# Altium PCB SM3320-BATT-EV.PcbDoc (part 2 of 2)
Units mm, origin at the board's own origin, x right, y up, seen from the top; angles counter-clockwise.
Board outline 215 x 68 mm, 2 copper layers (Top Layer, Bottom Layer), stack 1.662 mm thick; 183 components, 86 nets, 440 pads, 263 vias.
Unrouted connection lines stored in the file: 6.
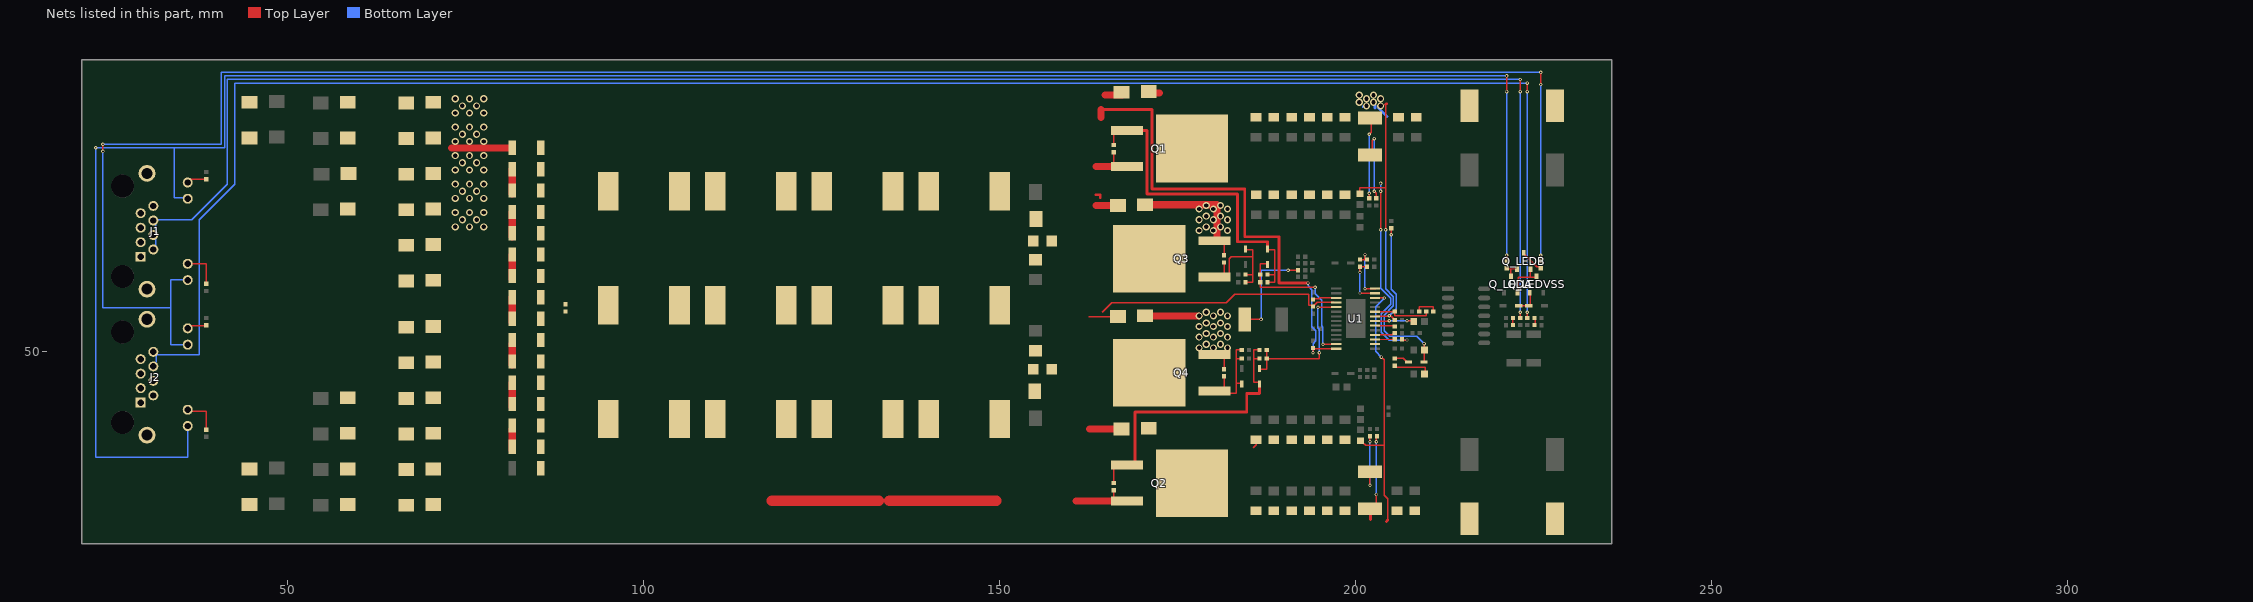
[diagram p2: the nets of this part, all layers, seen from the top]

## Via types
v1: diameter 1, hole 0.6, Top Layer to Bottom Layer, tented both sides, 168 vias
v2: diameter 0.48, hole 0.254, Top Layer to Bottom Layer, tented both sides, 95 vias

## Nets (pads, with @x,y where several pads share a name; then routed paths per layer and width w, separated by ;. In a path a pad name is that pad's centre, name@x,y a point inside that pad or via, vN(x,y) a via of type N, cw(c..) or ccw(c..) an arc to the next point about the centre after c; other vN are vias at no path point) (continued)
ISNS_F+: CISNS.2 Risns+.1 U1.14 | length 7.7
  Top Layer w0.2: CISNS.2@200.6,62.908 201.292,62.908 201.3,62.9 v2(201.3,63.6) ; v2(201.3,58.8) 201.32,58.82 U1.14@202.7,58.82 U1.14@202.8,58.82 ; Risns+.1@201.592,62.908 Risns+.1@201.6,62.9
  Bottom Layer w0.2: v2(201.3,58.8) v2(201.3,63.6)
ISNS_F-: CISNS.1 Risns-.1 U1.13 | length 6.6
  Top Layer w0.2: v2(200.6,58.2) U1.13@202.7,58.17 ; v2@200.6,61.3 CISNS.1@200.6,61.892 ; CISNS.1@200.6,61.9 CISNS.1@200.6,61.892 ; Risns-.1@201.6,61.9 201.592,61.892 CISNS.1@200.6,61.892
  Bottom Layer w0.2: v2(200.6,58.2) v2(200.6,61.1)
LED_A: J1.11 J2.9 R_LEDB_O.2 | length 304.2
  Top Layer w0.2: R_LEDB_O.2@221.2,62.708 v2(221.2,63.5) ; v2(221.2,86.5) v2(221.2,88.7)
  Bottom Layer w0.2: J2.9@35.915,39.517 35.915,35.1 23,35.1 23,75.7 v2(23,78.6) 34,78.6 ; J1.11@36,71.6 34,71.6 34,78.6 ; v2(221.2,63.5) v2(221.2,86.5) ; v2@221.3,88.7 v2(221.2,88.7) 41.1,88.7 41.1,78.6 34,78.6
LED_B: J1.9 J2.11 R_LEDA_O.2 | length 285.3
  Top Layer w0.2: v2(24,78.1) v2(24,79.1) v2@24,79.2 ; R_LEDA_O.2@226,62.708 v2(226,63.5) ; v2(226,87.5) v2(226,89.2)
  Bottom Layer w0.2: v2(24,78.1) 24,56.1 33.5,56.1 ; v2(24,79.1) 40.6,79.1 40.6,89.2 v2(226,89.2) ; J2.11@35.915,50.947 33.5,50.947 33.5,56.1 ; J1.9@36,60.1 33.5,60.1 33.5,56.1 ; v2(226,63.5) v2(226,87.5)
LED_VSS: Q_LEDA.2 Q_LEDB.2 Q_LEDVSS.3 | length 5.8
  Top Layer w0.2: Q_LEDA.2@222.8,58.6 222.8,60.4 224.5,60.4 ; Q_LEDB.2@224.4,61.5 224.5,61.5 224.5,60.4 ; Q_LEDVSS.3@225.5,60.55 225.35,60.4 224.5,60.4
MODE: Rmode.2 U1.4 | length 2.5
  Top Layer w0.2: U1.4@203,52.32 205.08,52.32 ; 205.12,52.32 Rmode.2@205.4,52.6
NetC18_1: C18.1 D15.2 R110.2
NetC19_1: C19.1 D14.2 R140.2
NetCcomp_2: Ccomp.2 Rcomp.1 | length 3.5
  Top Layer w0.2: Ccomp.2@208.9,55.5 208.9,56.3 210.908,56.3 Rcomp.1@210.908,55.6
NetD3_2: D3.2 Q1.1 R4.2 R18.2 R18_a.2 | length 50.9
  Top Layer w0.2: R4.2@166,79.008 166,81 Q1.1@166.1,81 ; D3.2@187.6,64.4 187.6,64.3 188.6,64.3 ; R18.2@187.608,59.7 188.6,59.7 ; R18_a.2@187.608,60.8 188.6,60.8 ; 188.6,59.7 188.6,60.8 ; 188.6,59.7 188.6,60.8 ; 188.6,60.8 188.6,64.3 ; 188.6,60.8 188.6,64.3
  Top Layer w0.4: Q1.1@167.856,81.04 170.7,81.04 170.7,72.1 183.4,72.1 183.4,65.4 187.6,65.4 D3.2@187.6,64.3
NetD4_2: D4.2 Q2.1 R3.1 R19.1 R19_a.1 | length 38.3
  Top Layer w0.2: R3.1@166,31.508 Q2.1@166,33.5 ; R19_a.1@186.492,49 185.7,49 ; R19.1@186.492,50.2 185.7,50.2 185.7,49 ; D4.2@186.5,45.7 185.7,45.7 185.7,49
  Top Layer w0.4: Q2.1@168.5,33.7 Q2.1@168.6,33.7 ; Q2.1@169,33.7 169,41.5 184.7,41.5 184.7,44.1 186.5,44.1 186.5,45 D4.2@186.5,45.5
NetD5_2: D5.2 Q3.1 R22.2 R32.2 R32_a.2 | length 17.1
  Top Layer w0.2: Q3.1@181.5,61 R22.2@181.5,62.492 ; Q3.1@182,60.4 182,60.46 Q3.1@182,60.5 ; Q3.1@182.2,60.46 182.2,63 182.5,63.3 185.5,63.3 ; D5.2@184.5,64.3 185.5,64.3 185.5,63.3 ; R32_a.2@184.508,60.8 185.5,60.8 ; R32.2@184.608,59.7 185.5,59.7 185.5,60.8 ; 185.5,60.8 185.5,63.3
  Top Layer w0.4: Q3.1@182,60.2 Q3.1@182,60.4
  Top Layer w0.5: Q3.1@180.144,60.46 Q3.1@182,60.46
NetD6_2: D6.2 Q4.1 R23.1 R33.1 R33_a.1 | length 15.4
  Top Layer w0.2: Q4.1@181.5,45 R23.1@181.5,46.492 ; 182.4,44.1 183.2,44.1 183.2,45.5 ; R33.1@183.9,50.2 183.2,50.2 ; R33_a.1@183.984,49 183.2,49 ; D6.2@184,45.5 183.5,45.5 183.2,45.5 ; 183.2,45.5 183.2,49 ; 183.2,45.5 183.2,49 ; 183.2,49 183.2,50.2 ; 183.2,49 183.2,50.2
NetD_CLAMP_1_2: D_CLAMP_1.2 D_CLAMP_2.1 | length 0.5
  Top Layer w0.5: D_CLAMP_2.1@85.5,75.1 D_CLAMP_2.1@85.5,75.6
NetD_CLAMP_2_2: D_CLAMP_2.2 D_CLAMP_3.1 | length 3.5
  Top Layer w1: D_CLAMP_3.1@81.5,72.1 D_CLAMP_2.2@81.5,75.6
NetD_CLAMP_3_2: D_CLAMP_3.2 D_CLAMP_4.1 | length 0
NetD_CLAMP_4_2: D_CLAMP_4.2 D_CLAMP_5.1 | length 3.5
  Top Layer w1: D_CLAMP_5.1@81.5,66.1 D_CLAMP_4.2@81.5,69.6
NetD_CLAMP_5_2: D_CLAMP_5.2 D_CLAMP_6.1
NetD_CLAMP_6_2: D_CLAMP_6.2 D_CLAMP_7.1 | length 3.5
  Top Layer w1: D_CLAMP_7.1@81.5,60.1 D_CLAMP_6.2@81.5,63.6
NetD_CLAMP_7_2: D_CLAMP_7.2 D_CLAMP_8.1 R160.2
NetD_CLAMP_8_2: D_CLAMP_8.2 D_CLAMP_9.1 | length 4
  Top Layer w0.5: D_CLAMP_8.2@81.5,57.6 D_CLAMP_8.2@81.5,58.1
  Top Layer w1: D_CLAMP_9.1@81.5,54.1 D_CLAMP_8.2@81.5,57.6
NetD_CLAMP_9_2: D_CLAMP_9.2 D_CLAMP_10.1 R160.1
NetD_CLAMP_10_2: D_CLAMP_10.2 D_CLAMP_11.1 | length 3
  Top Layer w1: D_CLAMP_11.1@81.5,48.1 D_CLAMP_10.2@81.5,51.1
NetD_CLAMP_11_2: D_CLAMP_11.2 D_CLAMP_12.1
NetD_CLAMP_12_2: D_CLAMP_12.2 D_CLAMP_13.1 | length 3.5
  Top Layer w1: D_CLAMP_13.1@81.5,42.1 D_CLAMP_12.2@81.5,45.6
NetD_CLAMP_13_2: D_CLAMP_13.2 D_CLAMP_14.1
NetD_CLAMP_14_2: D_CLAMP_14.2 D_CLAMP_15.1 | length 3
  Top Layer w1: D_CLAMP_15.1@81.5,36.1 D_CLAMP_14.2@81.5,39.1
NetD_CLAMP_15_2: D_CLAMP_15.2 D_CLAMP_16.1
NetDf_1: Df.1 Rf.2 | length 1.8
  Top Layer w0.2: Rf.2@205.5,49.008 206.692,49.008 Df.1@207.1,48.6
NetJ1_10: J1.10 R101.2 | length 5.2
  Top Layer w0.2: J1.10@35.9,62.3 38.5,62.3 R101.2@38.5,59.7 ; R101.2@38.5,59.5 R101.2@38.5,59.508
NetJ1_12: J1.12 R100.2 | length 2.5
  Top Layer w0.2: J1.12@36.2,74.2 R100.2@38.7,74.2
NetJ1_S1: J1.S1 J1.S2
NetJ2_10: J2.10 R102.2 | length 5.1
  Top Layer w0.2: J2.10@36,41.6 38.5,41.6 R102.2@38.5,39.008
NetJ2_12: J2.12 R103.2 | length 2.5
  Top Layer w0.2: J2.12@36,53.6 R103.2@38.5,53.6
NetJ2_S1: J2.S1 J2.S2
NetQ_LEDA_3: Q_LEDA.3 Q_LEDB.1 R_LEDB_O.1 | length 2.9
  Top Layer w0.2: R_LEDB_O.1@221.2,61.692 221.2,61.6 221.8,61.6 ; Q_LEDA.3@221.7,60.55 221.8,60.65 221.8,61.6 ; Q_LEDB.1@222.7,61.5 Q_LEDB.1@222.65,61.55 Q_LEDB.1@222.6,61.6 ; Q_LEDB.1@222.7,61.7 Q_LEDB.1@222.6,61.6 ; 221.8,61.6 Q_LEDB.1@222.6,61.6
NetQ_LEDB_3: Q_LEDB.3 R_LEDA_O.1 | length 3.2
  Top Layer w0.2: Q_LEDB.3@223.6,63.8 223.6,63.7 225.4,61.9 225.692,61.9 R_LEDA_O.1@225.9,61.692
NetR_1A_a_2: R_1A_a.2 R_1A_b.1 | length 1
  Top Layer w0.2: R_1A_b.1@222.092,53.7 222.092,54.692 R_1A_a.2@222.1,54.7
NetR_1B_a_2: R_1B_a.2 R_1B_b.1 | length 1.1
  Top Layer w0.2: R_1B_b.1@225.2,53.6 225.208,53.608 225.208,53.7 R_1B_a.2@225.208,54.7
PAN_DET: D_1A.1 D_1B.1 Q_LEDVSS.1 | length 3.8
  Top Layer w0.2: D_1A.1@222.5,56.4 222.6,56.4 D_1B.1@224.4,56.4 ; D_1B.1@224.5,56.4 224.5,58.25 Q_LEDVSS.1@224.55,58.25
PGND: D9.2 D12.2 Q3.3 Q4.3 R22.1 R23.2 R40.1 Rcsp.2 | length 39
  Top Layer w0.2: Q4.3@181.4,49.4 Q4.3@181.4,49.508 ; R23.2@181.5,47.508 Q4.3@181.5,49.5 ; R22.1@181.5,63.508 Q3.3@181.5,65 ; R40.1@184.5,54.5 v2(186.7,54.5) ; R40.1@184.5,55.5 R40.1@184.5,55.6 ; v2(190.5,61.4) 191.7,61.4 Rcsp.2@191.8,61.3
  Top Layer w1: D9.2@170.4,55 v1(178,55) ; 171.5,70.6 180.5,70.6 ; Q3.3@180.5,65.5 180.5,68.5 v1@180.5,70
  Bottom Layer w0.2: v2(186.7,54.5) 186.7,61.4 v2(190.5,61.4)
  other v1: 178,50.5 180,50.5 182,50.5 179,51 181,51 178,52 180,52 182,52 179,52.5 181,52.5 178,53.5 180,53.5 182,53.5 179,54 181,54 180,55 182,55 179,55.5 181,55.5 178,67 180,67 182,67 179,67.5 181,67.5 178,68.5 180,68.5 182,68.5 179,69 181,69 178,70 180,70 182,70 179,70.5 181,70.5
PGOOD: Rpg.1 U1.17 | length 3.4
  Top Layer w0.2: Rpg.1@193.9,57.2 Rpg.1@194.1,57.4 ; Rpg.1@194.2,57.3 194.3,57.4 194.8,57.4 194.925,57.525 U1.17@197.25,57.525
RT: Rt.2 U1.6 | length 2.5
  Top Layer w0.2: U1.6@203,53.62 Rt.2@205.38,53.62 ; Rt.2@205.4,53.6 Rt.2@205.38,53.62 ; Rt.2@205.5,53.6 205.48,53.62 Rt.2@205.38,53.62
SLOPE: Cslope.2 U1.7 | length 5.8
  Top Layer w0.2: U1.7@202.7,54.27 204.77,54.27 204.74,54.3 v2(204.7,54.3) ; v2(207.2,54.3) 207.93,54.3 Cslope.2@208.13,54.1
  Bottom Layer w0.2: v2(204.7,54.3) v2(207.2,54.3) v2@207.3,54.3
SOL_1A: D1_a.2 D1_b.2 D1_c.2 D1_d.2 D1_e.2 D1_f.2 D3_a.1 D3_b.1 D3_c.1 D3_d.1 D3_e.1 D3_f.1 J1.1 J1.2 J1.3 J1.4 J1.5 J1.6 J1.7 J1.8 R_1A_a.1 | length 246.2
  Top Layer w0.2: v2(223.1,55.5) 223.1,54.716 R_1A_a.1@223.116,54.7 ; v2(223.1,86.5) v2(223.1,88.2)
  Bottom Layer w0.2: J1.2@31.4,64.4 31.4,68.5 36.5,68.5 41.5,73.5 41.5,88.2 v2(223.1,88.2) v2@223.2,88.2 ; v2(223.1,55.5) v2(223.1,86.5)
SOL_1B: D2_a.2 D2_b.2 D2_c.2 D2_d.2 D2_e.2 D2_f.2 D4_a.1 D4_b.1 D4_c.1 D4_d.1 D4_e.1 D4_f.1 J2.1 J2.2 J2.3 J2.4 J2.5 J2.6 J2.7 J2.8 R_1B_a.1 | length 262.1
  Top Layer w0.2: v2(224.1,55.5) 224.1,54.792 224.192,54.7 R_1B_a.1@224.2,54.7 ; v2(224.1,86.5) v2(224.1,87.7)
  Bottom Layer w0.2: 31.5,48.5 31.5,49.5 37.5,49.5 37.5,68.5 42.5,73.5 42.5,87.7 v2@224,87.7 ; v2(224.1,55.5) 224.1,86 v2(224.1,86.5) ; v2(224.1,87.7) v2@224,87.7 ; v2@224.1,87.8 v2@224,87.7
SS: Css.2 Rfb2.1 U1.8 | length 15.7
  Top Layer w0.2: U1.8@202.8,55 202.88,54.92 203.1,54.92 204.98,54.92 Css.2@205.4,54.5 ; v2(205,66.4) Rfb2.1@205,67.192
  Bottom Layer w0.2: v2(204.7,55) 205.7,56 205.7,58 205,58.7 205,66.3 v2@205.1,66.4
SW1: C18.2 Cboot1.1 D12.1 D13.2 L1.1 L2.1 L3.1 L4.1 L5.1 L6.1 L7.1 L8.1 L9.1 L10.1 L11.1 L12.1 Q1.3 Q3.2 R4.1 U1.28 | length 81.2
  Top Layer w0.2: R4.1@166,77.992 166,76 166,75.8 Q1.3@166.1,75.8 ; v2(194,49.8) 194,50.4 197.25,50.4 U1.28@197.25,50.375
  Top Layer w0.4: 163.5,72 164.1,72 164.1,71.6 ; 164.6,84 171.4,84 171.4,72.8 184.4,72.8 184.4,66.1 189.2,66.1 189.2,59.6 v2(193.3,59.6)
  Top Layer w1: 163.5,70.5 D12.1@166.1,70.5 ; 163.5,76 166,76 167.856,76 Q1.3@167.856,75.96 ; 164.2,82.9 164.2,84 ; 164.8,86 D13.2@167.2,86
  Bottom Layer w0.2: v2(193.3,59.6) 193.3,59.2 193.85,58.65 193.85,53.45 194.4,52.9 194.4,51.5 194,51.1 v2(194,49.8)
SW2: C19.2 Cboot2.1 D7.2 D9.1 L1.2 L2.2 L3.2 L4.2 L5.2 L6.2 L7.2 L8.2 L9.2 L10.2 L11.2 L12.2 Q2.3 Q4.2 R3.2 U1.18 | length 83.1
  Top Layer w0.2: 162.5,54.9 D9.1@166.6,54.9 D9.1@166.5,55 ; 164.4,55.5 165.7,56.8 181.8,56.8 183,58 193.4,58 193.4,56.5 194.2,56.5 194.6,56.9 U1.18@196.9,56.9 ; Q2.3@166,28.5 166,28.96 R3.2@166,30.492
  Top Layer w1: 160.7,28.96 166,28.96 Q2.3@167.856,28.96 ; 162.6,39.1 D7.2@167.1,39.1
  Top Layer w1.5: 118,29 133,29 ; 134.5,29 149.5,29
TG1: D3.1 R18.1 R18_a.1 U1.27 | length 22.2
  Top Layer w0.2: D3.1@187.6,62.3 186.6,62.3 186.6,59.308 186.6,59 v2(194.3,59) ; v2(195.4,51) U1.27@197.1,51
  Bottom Layer w0.2: v2(194.3,59) 194.3,58.1 195.2,57.2 195.2,56.6 195.2,53.6 195.4,53.4 v2(195.4,51)
TG2: D4.1 R19.2 R19_a.2 U1.19 | length 20.5
  Top Layer w0.2: D4.1@186.5,47.5 187.5,47.5 187.508,47.508 R19_a.2@187.508,49 ; R19.2@187.4,50.2 187.508,50.092 R19_a.2@187.508,49 ; v2(194.7,56.2) U1.19@196.9,56.2 ; v2@194.9,49.7 194.9,49 R19_a.2@187.508,49
  Bottom Layer w0.2: v2(194.7,56.2) 194.7,53.3 194.9,53.1 v2(194.9,49.8)
VC: Ccomp2.2 Rcomp.2 U1.9 | length 8.1
  Top Layer w0.2: U1.9@202.7,55.57 U1.9@202.7,55.6 ; U1.9@203,55.6 204.892,55.6 Ccomp2.2@205.492,55.6 Ccomp2.2@205.5,55.6 ; Ccomp2.2@205.6,55.6 Ccomp2.2@205.5,55.6 ; Rcomp.2@209.9,55.5 209.9,55 205.5,55 Ccomp2.2@205.5,55.6
VIN: Cf.2 Rf.1 | length 5.3
  Top Layer w0.2: Rf.1@205.5,47.992 205.692,47.8 209.8,47.8 Cf.2@209.8,46.9
VIN_D: U1.2
VIN_N: C4.2 C5.2 C6.2 C7.2 C8.2 C9.2 C10.2 C11.2 C12.2 C70.2 C72.2 C130.2 D13.1 Q1.2 R1.1 Riinsns2.2 Rvisns.1 | length 38.9
  Top Layer w0.2: R1.1@202.3,78.2 202.3,79.6 v2(202.6,79.9) ; v2(202.6,72.5) 202.9,72.2 Riinsns2.2@202.9,71.5 ; v2(203.5,67.1) 203.5,72.3 203.6,72.4 v2(203.5,72.5) ; Rvisns.1@206.5,51.7 206.6,51.6 v2(207.2,51.6)
  Top Layer w1: D13.1@170.9,86.5 171.1,86.3 172.4,86.3
  Bottom Layer w0.2: v2(202.6,72.5) v2(202.6,79.9) v2@202.6,80 ; v2(203.5,67.1) 203.5,58.9 204.9,57.5 204.9,56.6 203.6,55.3 203.6,52.7 204.7,51.6 v2(207.2,51.6) ; v2(203.5,72.5) v2(203.5,73.6)
VIN_P: C41.2 C45.2 C52.2 C620.2 D1_a.1 D1_b.1 D1_c.1 D1_d.1 D1_e.1 D1_f.1 D2_a.1 D2_b.1 D2_c.1 D2_d.1 D2_e.1 D2_f.1 D_CLAMP_1.1 Df.2 R1.2 R53.2 Riinsns1.2 Ruvt.2 | length 68.6
  Top Layer w0.2: R53.2@200.6,72.17 200.6,73 204.2,73 ; Riinsns1.2@201.9,71.508 v2(201.9,72.2) ; v2(201.9,80.5) 202.2,80.8 202.2,82.8 R1.2@202.3,82.9 ; v2(204.2,67.1) 204.2,73 ; 204.2,84.7 204.2,73 ; Df.2@209.6,48.5 209.6,50.2 Ruvt.2@209.7,50.3 ; Ruvt.2@209.6,50.3 v2(209.6,51.1)
  Top Layer w0.4: R53.2@200.6,72 R53.2@200.6,72.17 ; 204.2,84.7 204.3,84.8
  Top Layer w1: 73,78.6 77.5,78.6 D_CLAMP_1.1@81.2,78.6
  Bottom Layer w0.2: 201,84.2 v1@201,84.5 ; v2(201.9,72.2) v2(201.9,80.5) ; v2(204.2,67.1) 204.2,58.8 205.3,57.7 205.3,56.4 204,55.1 204,52.9 204.8,52.1 208.6,52.1 v2(209.6,51.1)
  Bottom Layer w0.4: 202.7,84.2 202.7,84.5 ; v1@203.2,84.2 204.4,83
  other v1: 73.5,67.5 75.5,67.5 77.5,67.5 74.5,68.5 76.5,68.5 73.5,69.5 75.5,69.5 77.5,69.5 73.5,71.5 75.5,71.5 77.5,71.5 74.5,72.5 76.5,72.5 73.5,73.5 75.5,73.5 77.5,73.5 73.5,75.5 75.5,75.5 77.5,75.5 74.5,76.5 76.5,76.5 73.5,77.5 75.5,77.5 77.5,77.5 73.5,79.5 75.5,79.5 77.5,79.5 74.5,80.5 76.5,80.5 73.5,81.5 75.5,81.5 77.5,81.5 73.5,83.5 75.5,83.5 77.5,83.5 74.5,84.5 76.5,84.5 201.5,84.5 203.5,84.5 200.5,85 202.5,85 73.5,85.5 75.5,85.5 77.5,85.5 201.5,85.5 203.5,85.5 200.5,86 202.5,86
VISNS: Rvisns.2 U1.3 | length 2.7
  Top Layer w0.2: U1.3@202.7,51.67 Rvisns.2@205.4,51.7 ; Rvisns.2@205.47,51.67 Rvisns.2@205.5,51.7
VOUT_N: C50.2 C51.2 C54.2 C55.2 R10.2 R13.2 Rioutsns2.2 U1.12 | length 48.4
  Top Layer w0.2: R13.2@200.8,37.2 201,37.2 201.4,36.8 204,36.8 ; U1.12@202.7,57.52 204.08,57.52 204.06,57.5 v2(204,57.5) ; R10.2@202.9,27.9 v2(202.9,29.9) ; v2@202.9,37.4 Rioutsns2.2@202.9,38.284 ; v2(203.6,49.2) 204,48.8 204,36.8 ; 204.5,26.3 204.5,29.3 204,29.8 204,36.8
  Top Layer w0.4: 202.1,26.4 R10.2@202.1,27.2 ; 204.3,26.1 204.5,26.3
  Bottom Layer w0.2: v2@202.9,30.1 v2(202.9,37.3) ; v2(203.6,49.2) 202.8,50 202.8,56.3 v2(204,57.5)
VOUT_P: C1.2 C16.2 C20.2 C25.2 C27.2 C28.2 C30.2 C36.2 C44.2 C410.2 C450.2 C470.2 D7.1 Q2.2 R10.1 Rioutsns1.2 | length 11
  Top Layer w0.2: 185.6,36.5 186,36.9 C470.2@186,38.005 ; v2(202,31.2) R10.1@202,33.3 ; v2@202,37.4 Rioutsns1.2@202,38.284 ; R10.1@203.4,33 R10.1@203.6,33
  Bottom Layer w0.2: v2(202,31.2) v2(202,37.3)
pads on no net: J1. J2.

## Polygon pours and split planes (outlines as drawn)
GND on Bottom Layer "Bottom Layer-GND" (solid, pour order 1242): 184,71 234,71 234,38.7 184,38.7
GND on Bottom Layer "Bottom Layer-GND 1" (solid, pour order 1246): 320.075,32.439 320.074,63.939 280.574,63.939 280.575,32.439

## Other copper
Top Layer:
  rectangle net GND: 205.3,32.2 229.3,37.7
  rectangle net GND: 205.5,73.3 229.5,78.8
  rectangle net VOUT_N: 226,24 229.5,30.5
  rectangle net VOUT_N: 210.5,25.5 229.5,30.5
  rectangle net VOUT_N: 207,24.5 216,26.5
  rectangle net VIN_P: 226,80.5 229.5,87
  rectangle net VIN_P: 210.5,80.5 229.5,85.5
  rectangle net VIN_P: 208.5,84 216,86.5
  rectangle net VOUT_N: 200,24.5 204,29
  region net VOUT_N: 208.5,24.5 208.5,26.5 200.1,26.5 200.1,24.5
  rectangle net VOUT_N: 207.8,25.9 208.8,27.9
  rectangle net VOUT_N: 205.3,25.9 206.3,27.9
  region net GND: 208.8,32.5 207.8,32.5 207.8,30 208.8,30
  region net GND: 206.3,32.5 205.3,32.5 205.3,30 206.3,30
  rectangle net GND: 208,78.5 209,80.5
  rectangle net GND: 205.5,78.5 206.5,80.5
  rectangle net VIN_P: 208,82.5 209,84.5
  rectangle net VIN_P: 205.5,82.5 206.5,84.5
  rectangle net GND: 185.8,51.5 192.9,52.7
  rectangle net PGND: 169.3,54.1 182.6,56
  rectangle net VIN_P: 200,84 209.5,86.5
  rectangle net GND: 184.3,79.4 199.2,80.4
  rectangle net VOUT_P: 172,24.5 199,26.5
  rectangle net SOL_1B: 40,27 43,48
  rectangle net SOL_1A: 40,66.8 43,86.5
  region net VIN_N: 199,84 199,87.4 171.9,87.4 171.9,84
  rectangle net GND: 188.3,51.5 193,57.5
  region net VOUT_P: 203.7,33 203.7,36.5 198,36.5 198,33
  region net VIN_N: 203.8,73.5 203.8,77.5 198,77.5 198,73.5
  rectangle net VIN_N: 174,73.3 203.8,78.8
  region net SW1: 107,81 100.5,81 100.5,37.5 107,37.5
  region net SW2: 99.5,75.5 93,75.5 93,32 99.5,32
  region net GND: 155.5,76 154.5,76 154.5,72 155.5,72
  rectangle net GND: 154.5,37 155.5,41
  rectangle net NetC19_1: 154.5,43.5 155.5,50.5
  rectangle net NetC18_1: 154.5,62.5 155.5,69.5
  rectangle net GND: 154.5,53 155.5,60
  region net SW1: 152.5,81 146,81 146,37.5 152.5,37.5
  rectangle net SW2: 138.5,32 145,75.5
  rectangle net SW2: 123.5,32 130,75.5
  region net SW1: 122,80.5 115.5,80.5 115.5,37.5 122,37.5
  region net SW2: 114.5,75.5 108,75.5 108,32 114.5,32
  region net SW1: 137.5,81 131,81 131,37.5 137.5,37.5
  rectangle net NetD_CLAMP_1_2: 86.5,74.6 90.5,79.6
  rectangle net NetD_CLAMP_3_2: 86.5,68.6 90.5,73.6
  rectangle net NetD_CLAMP_5_2: 86.5,62.6 90.5,67.6
  rectangle net NetD_CLAMP_7_2: 86.5,56.6 90.5,61.6
  rectangle net NetD_CLAMP_9_2: 86.5,50.6 90.5,55.6
  rectangle net NetD_CLAMP_11_2: 86.5,44.6 90.5,49.6
  rectangle net NetD_CLAMP_13_2: 86.5,38.6 90.5,43.6
  rectangle net NetD_CLAMP_15_2: 86.5,32.6 90.5,37.6
  rectangle net SOL_1B: 28.5,42.1 32,50.6
  rectangle net SOL_1B: 28.5,43.5 43,49
  rectangle net SOL_1B: 40,43.5 49,56
  rectangle net SOL_1B: 40,46 62,56
  rectangle net GND: 50,68.5 53,86.5
  rectangle net GND: 50,27 53,45
  rectangle net SOL_1A: 40,57.5 45,69.5
  rectangle net SOL_1A: 40,57.5 62,67.5
  region net VIN_P: 204,81.5 204,86.5 200,86.5 200,81.5
  rectangle net GND: 185.5,67 199,68
  region net GND: 184.2,30.9 184.2,29.9 199.1,29.9 199.1,30.9
  rectangle net PGND: 169.3,69.1 182.5,71.1
  rectangle net PGND: 177.3,64 182.5,71
  rectangle net PGND: 169.3,53.5 182,55.5
  rectangle net PGND: 177.3,48 182.5,55.5
  rectangle net VOUT_P: 171.9,24.5 182,40.1
  rectangle net NetD_CLAMP_1_2: 85.5,75.1 87,76.1
  rectangle net NetD_CLAMP_1_2: 85.5,78.1 87,79.1
  rectangle net NetD_CLAMP_3_2: 85.5,69.1 87,70.1
  rectangle net NetD_CLAMP_3_2: 85.5,72.1 87,73.1
  rectangle net NetD_CLAMP_5_2: 85.5,63.1 87,64.1
  rectangle net NetD_CLAMP_5_2: 85.5,66.1 87,67.1
  rectangle net NetD_CLAMP_7_2: 85.5,57.1 87,58.1
  rectangle net NetD_CLAMP_7_2: 85.5,60.1 87,61.1
  rectangle net NetD_CLAMP_9_2: 85.5,51.1 87,52.1
  rectangle net NetD_CLAMP_9_2: 85.5,54.1 87,55.1
  rectangle net NetD_CLAMP_11_2: 85.5,45.1 87,46.1
  rectangle net NetD_CLAMP_11_2: 85.5,48.1 87,49.1
  rectangle net NetD_CLAMP_13_2: 85.5,39.1 87,40.1
  rectangle net NetD_CLAMP_13_2: 85.5,42.1 87,43.1
  rectangle net NetD_CLAMP_15_2: 85.5,33.1 87,34.1
  rectangle net NetD_CLAMP_15_2: 85.5,36.1 87,37.1
  rectangle net SW2: 157,27 165,56
  rectangle net SOL_1A: 29.5,64 49,69.5
  rectangle net SOL_1A: 28.5,62.6 32,71.1
  region net SOL_1B: 66.5,28 66.5,29 64.5,29 64.5,28
  region net VIN_P: 72.5,28 72.5,29 70.5,29 70.5,28
  region net VIN_P: 71,85.5 71,84.5 73,84.5 73,85.5
  region net SOL_1A: 64,85.5 64,84.5 66,84.5 66,85.5
  region net SOL_1A: 42.5,80.5 42.5,79.5 44.5,79.5 44.5,80.5
  region net SOL_1B: 44,33 44,34 42,34 42,33
  region net GND: 49,80.5 49,79.5 51,79.5 51,80.5
  region net GND: 50.5,33 50.5,34 48.5,34 48.5,33
  region net SOL_1B: 65,27 65,56 60,56 60,27
  region net GND: 50.5,28 50.5,29 48.5,29 48.5,28
  region net GND: 52.5,29 52.5,28 54.5,28 54.5,29
  region net GND: 52.5,34 52.5,33 54.5,33 54.5,34
  region net GND: 52.5,39 52.5,38 54.5,38 54.5,39
  region net GND: 52.5,44 52.5,43 54.5,43 54.5,44
  region net SOL_1A: 61,84.5 61,85.5 59,85.5 59,84.5
  region net SOL_1A: 42,85.5 42,84.5 44,84.5 44,85.5
  region net GND: 49,85.5 49,84.5 51,84.5 51,85.5
  region net GND: 54,84.5 54,85.5 52,85.5 52,84.5
  region net GND: 54,79.5 54,80.5 52,80.5 52,79.5
  region net GND: 54,69.5 54,70.5 52,70.5 52,69.5
  region net GND: 54,74.5 54,75.5 52,75.5 52,74.5
  region net SOL_1A: 61,79.5 61,80.5 59,80.5 59,79.5
  region net SOL_1A: 61,74.5 61,75.5 59,75.5 59,74.5
  region net SOL_1A: 61,69.5 61,70.5 59,70.5 59,69.5
  region net SOL_1A: 64,80.5 64,79.5 66,79.5 66,80.5
  region net SOL_1A: 64,75.5 64,74.5 66,74.5 66,75.5
  region net SOL_1A: 64,70.5 64,69.5 66,69.5 66,70.5
  region net SOL_1A: 64,65.5 64,64.5 66,64.5 66,65.5
  region net SOL_1A: 64,60.5 64,59.5 66,59.5 66,60.5
  region net VIN_P: 71,60.5 71,59.5 73,59.5 73,60.5
  region net VIN_P: 71,65.5 71,64.5 73,64.5 73,65.5
  region net VIN_P: 71,70.5 71,69.5 73,69.5 73,70.5
  region net VIN_P: 71,75.5 71,74.5 73,74.5 73,75.5
  region net VIN_P: 71,80.5 71,79.5 73,79.5 73,80.5
  region net VIN_P: 73,33 73,34 71,34 71,33
  region net SOL_1B: 66,33 66,34 64,34 64,33
  region net SOL_1B: 66,43 66,44 64,44 64,43
  region net SOL_1B: 66,38 66,39 64,39 64,38
  region net VIN_P: 73,38 73,39 71,39 71,38
  region net VIN_P: 73,43 73,44 71,44 71,43
  region net VIN_P: 73,48 73,49 71,49 71,48
  region net VIN_P: 73,53 73,54 71,54 71,53
  region net SOL_1B: 66,48 66,49 64,49 64,48
  region net SOL_1B: 66,53 66,54 64,54 64,53
  region net SOL_1B: 59,44 59,43 61,43 61,44
  region net SOL_1B: 59,39 59,38 61,38 61,39
  region net SOL_1B: 59,34 59,33 61,33 61,34
  region net SOL_1B: 59,29 59,28 61,28 61,29
  region net SOL_1B: 44,28 44,29 42,29 42,28
  rectangle net SOL_1A: 60,57.5 65,86.5
  rectangle net VIN_P: 72,27 79.5,86.5
  region net GND: 199,69.4 198,69.4 198,67.4 199,67.4
  region net GND: 191.5,69.4 190.5,69.4 190.5,67.4 191.5,67.4
  region net GND: 194,69.4 193,69.4 193,67.4 194,67.4
  region net GND: 196.5,69.4 195.5,69.4 195.5,67.4 196.5,67.4
  region net GND: 189,69.4 188,69.4 188,67.4 189,67.4
  region net GND: 186.5,69.4 185.5,69.4 185.5,67.4 186.5,67.4
  rectangle net VIN_N: 185.5,82.5 186.5,84.5
  rectangle net VIN_N: 188,82.5 189,84.5
  rectangle net VIN_N: 190.5,82.5 191.5,84.5
  rectangle net VIN_N: 185.5,71.9 186.5,73.9
  rectangle net VIN_N: 188,71.9 189,73.9
  rectangle net VIN_N: 190.5,71.9 191.5,73.9
  rectangle net VIN_N: 193,71.9 194,73.9
  rectangle net VIN_N: 195.5,71.9 196.5,73.9
  rectangle net VIN_N: 198,71.9 199,73.9
  rectangle net VIN_N: 198,82.5 199,84.5
  rectangle net VIN_N: 195.5,82.5 196.5,84.5
  rectangle net VIN_N: 193,82.5 194,84.5
  rectangle net GND: 198,40.2 199,42.2
  rectangle net GND: 195.5,40.2 196.5,42.2
  rectangle net GND: 193,40.2 194,42.2
  rectangle net GND: 190.5,40.2 191.5,42.2
  rectangle net GND: 188,40.2 189,42.2
  rectangle net GND: 185.5,40.2 186.5,42.2
  rectangle net VOUT_P: 190.5,25.9 191.5,27.9
  rectangle net VOUT_P: 193,25.9 194,27.9
  rectangle net VOUT_P: 195.5,25.9 196.5,27.9
  rectangle net VOUT_P: 198,25.9 199,27.9
  rectangle net VOUT_P: 185.5,35.9 186.5,37.9
  rectangle net VOUT_P: 188,35.9 189,37.9
  rectangle net VOUT_P: 190.5,35.9 191.5,37.9
  rectangle net VOUT_P: 193,35.9 194,37.9
  rectangle net VOUT_P: 195.5,35.9 196.5,37.9
  rectangle net VOUT_P: 198,35.9 199,37.9
  rectangle net VOUT_P: 185.5,25.9 186.5,27.9
  rectangle net VOUT_P: 188,25.9 189,27.9
  rectangle net GND: 185.5,41.4 199,42.5
  rectangle net VOUT_P: 174,31.5 200,36.5
  rectangle net SW1: 157,57.5 165,85
  rectangle net SW1: 157,57.5 176.2,66.7
  rectangle net VIN_N: 171.9,73.3 182,87
  rectangle net SW2: 159.5,42.3 176.2,51.8
  region net SW2: 165,26 165,36 93,36 93,26
  region net SW1: 165,77 165,87 100.5,87 100.5,77
  region: 210,55.6
  region net PGND: 181.1,55.3 183,57.2 184.6,57.2 184.6,53.8 183,52.2 181.1,52.2
  pour cut-out: 190.7,60.9 190.7,62.8 192.4,62.8 192.4,60.9
Bottom Layer:
  rectangle net GND: 204,70 219.5,86.5
  rectangle net GND: 205,27 234,39
  rectangle net VIN_P: 195.5,82.5 203.5,86.5
  rectangle net VIN_P: 72,66.5 79.5,86.5
  rectangle net GND: 49,49 92,64.5
  rectangle net GND: 49,27 61.5,86.5
  rectangle net GND: 169,27 199,42.5
  region net GND: 189,80.5 170,80.5 170,72.5 189,72.5
  region net PGND: 183,43.5 183,71.5 174.5,71.5 174.5,43.5
  rectangle net SOL_1A: 28.5,62.6 32,71.1
  rectangle net GND: 181,27 201,42.5
  rectangle net VIN_P: 72,81 204.5,86.5
  rectangle net SOL_1B: 28.5,42.1 32,50.6
  region net GND: 201,67 201,80.5 184,80.5 184,67
  region net GND: 173.5,80.5 80.5,80.5 80.5,27 173.5,27
  pour cut-out: 191.5,60.55 186.6,60.55 186.6,62.8 191.5,62.8
  pour cut-out: 186.4,54 186.4,62.8 187.7,62.8 187.7,54

## Silkscreen, mask and mechanical layers (free items; w line width, h text height)
Top Overlay:
  text "B" at 110.5,82 h7
  text "JLCJLCJLCJLC" at 120.9,54.4 h1
Bottom Overlay:
  text "b" at 213.634,97 h70 r90
  text "PV_A" at 25.5,75.5 h2 r90
  text "GND" at 269.1,56.1 h0.8
  text "GND" at 276.7,56.1 h0.8
  text "PV_B" at 25.5,55 h2 r90
  text "SDA" at 269.1,53.6 h0.8
  text "SDA" at 276.7,53.6 h0.8
  text "SCL" at 269.1,51 h0.8
  text "SCL" at 276.7,51 h0.8
  text "+3V3" at 276.7,48.6 h0.8
  text "+5V" at 269,48.5 h0.8
  text "DC+" at 262,37 h2
  text "DC-" at 262,30 h2
Mechanical 9:
  drawing of 61 lines, arcs and shapes, not listed
  text "1" at 21.37,152.273 h1.12
  text "2" at 84.76,152.273 h1.12
  text "3" at 147.989,152.273 h1.12
  text "4" at 211.658,152.273 h1.12
  text "5" at 275.133,152.273 h1.12
  text "6" at 338.76,152.273 h1.12
  text "A" at -8.001,123.241 h1.12
  text "A" at 367.919,123.241 h1.12
  text "B" at 367.919,62.789 h1.12
  text "C" at 367.919,2.464 h1.12
  text "PROJECT TITLE:" at 290.703,-52.451 h1.12
  text ".PRJ_Title" at 291.973,-55.499 h1.12
  text "D" at -8.001,-57.734 h1.12
  text "D" at 367.919,-57.734 h1.12
  text "REV:" at 252.857,-59.817 h1.12
  text "PRINT DATE:" at 274.142,-59.817 h1.12
  text "DESIGNED FOR:" at 290.703,-59.817 h1.12
  text ".PCB_MinorRev" at 253.492,-63.754 h1.12
  text ".Print_Date" at 274.193,-63.754 h1.12
  text ".PRJ_Customer" at 291.973,-63.754 h1.12
  text "PADC NUMBER:" at 290.703,-67.691 h1.12
  text "FAB DRAWING NUMBER:" at 329.946,-67.691 h1.12
  text "National Semiconductor and/or its licensors do not warrant the accuracy or completeness of this" at 132.461,-67.742 h1.12
  text "specification or any information contained therein. National and/or its licensors do not warrant that" at 132.461,-70.094 h1.12
  text ".print_Scale" at 253.492,-70.485 h1.12
  text ".PRJ_PADC" at 291.973,-71.247 h1.12
  text "551" at 331.216,-71.247 h1.12
  text ".PRJ_BasePN" at 336.169,-71.247 h1.12
  text "this design will meet the specifications, will be suitable for your application or fit for any particular" at 132.461,-72.446 h1.12
  text "purpose, or will operate in an implementation. National and/or its licensors do not warrant that the" at 132.461,-74.798 h1.12
  text "FILE NAME:" at 252.857,-75.311 h1.12
  text "ALTIUM DESIGNER VERSION:" at 329.946,-75.311 h1.12
  text "design is production worthy. You should completely validate and test your design implementation" at 132.461,-77.15 h1.12
  text ".Pcb_File_Name_No_Path" at 253.492,-78.698 h1.12
  text ".Application_BuildNumber" at 331.216,-79.29 h1.12
  text "to confirm the system functionality for your application." at 132.461,-79.502 h1.12
  text "1" at 21.37,-83.947 h1.12
  text "2" at 84.76,-83.947 h1.12
  text "3" at 147.989,-83.947 h1.12
  text "4" at 211.658,-83.947 h1.12
  text "5" at 275.133,-83.947 h1.12
  text "6" at 338.76,-83.947 h1.12
Mechanical 10:
  drawing of 203 lines, arcs and shapes, not listed
  text "Update the notes below per your unique requirements." at 476.555,121.615 h1.12
  text "In most cases, you should be able to delete or modify lines." at 476.301,117.043 h1.12
  text "NOTES:  UNLESS OTHERWISE SPECIFIED" at 476.682,109.296 h1.12
  text "1. MATERIAL: PER IPC-4101/24" at 476.682,106.102 h1.12
  text "1A. LAMINATE: TYPE GFN, GRADE A, CLASS 2, AND TYPE FR-4" at 476.682,103.501 h1.12
  text "DESIGN INFORMATION" at 317.373,100.863 h1.52
  text "1A. LAMINATE: HIGH-TEMPERATURE FR4" at 478.333,99.715 h1.12
  text "1B. COPPER LAYERS: .0028 +/-.0005 INCH OUTER.   .0028 +/-.0005 INCH INNER LAYERS." at 478.46,97.114 h1.12
  text "(REFER ALSO ARRAY/PANEL PROFILING INFORMATION)" at 308.19,96.756 h1.52
  text "BOARD SIZE" at 290.765,96.647 h1.52
  text "3450MIL" at 302.508,93.4 h1.52
  text "X" at 315.353,93.4 h1.52
  text "5000MIL" at 321.228,93.4 h1.52
  text "1C. ALL COPPER LAYERS MUST BE SPACED PER DETAIL \"A\"." at 478.46,93.328 h1.12
  text "1D. BOARD THICKNESS IS MEASURED INCLUDING TOP AND BOTTOM SIDES FINISHED COPPER. ANY TIN," at 478.587,90.727 h1.12
  text "Number of Layers :" at 301.002,88.392 h1.52
  text "6" at 328.81,88.138 h1.52
  text "TIN/LEAD OR GOLD PLATING, SOLDERMASK AND SILKSCREEN LEGEND MUST NOT BE INCLUDED IN" at 484.556,87.533 h1.12
  text "MIN. TRACK WIDTH:" at 301.002,84.861 h1.52
  text "8" at 328.846,84.861 h1.52
  text "MIL" at 332.777,84.861 h1.52
  text "FINISHED BOARD THICKNESS." at 486.588,83.747 h1.12
  text "MIN. CLEARANCE:" at 301.002,81.509 h1.52
  text "8" at 328.846,81.509 h1.52
  text "MIL" at 332.777,81.509 h1.52
  text "1E. ALL INNER LAYERS MUST BE OXIDE COATED." at 480.619,80.553 h1.12
  text "MIN. VIA PAD SIZE:" at 301.002,78.156 h1.52
  text "24" at 328.084,78.156 h1.52
  text "MIL" at 332.777,78.156 h1.52
  text "2. ALL CONDUCTOR LAYERS MUST BE REGISTERED WITHIN +/- .005 INCH FROM TRUE POSITION." at 476.682,77.359 h1.12
  text "0.05mm (2MIL)" at 318.655,74.556 h1.52
  text "MINIMUM ANNULAR RING" at 292.639,74.448 h1.52
  text "EXTERNAL" at 336.638,74.448 h1.52
  text "3. ETCH TOLERANCES:" at 476.682,74.166 h1.12
  text "PER" at 297.719,71.45 h1.52
  text "IPC-D-275 CLASS 2 LEVEL C" at 303.307,71.45 h1.52
  text "3A. ALL EXTERNAL LAYERS CONDUCTOR WIDTH MUST BE WITHIN +/- .0015 INCH OR +/- 15% OF" at 480.619,70.972 h1.12
  text "MIL, HOLES" at 341.108,68.598 h1.52
  text "+/-" at 331.14,68.58 h1.52
  text "+/-" at 352.831,68.58 h1.52
  text "REGISTRATION TOLERANCES:" at 292.639,68.453 h1.52
  text "METAL" at 323.113,68.453 h1.52
  text "5" at 337.749,68.453 h1.52
  text "3" at 358.907,68.453 h1.52
  text "MIL" at 361.86,68.453 h1.52
  text "GERBER DATA, WHICHEVER IS SMALLER." at 487.604,68.371 h1.12
  text "3B. ALL INTERNAL LAYERS CONDUCTOR WIDTH MUST BE WITHIN +/- .0010 INCH OR +/- 15%" at 480.492,64.585 h1.12
  text "MATERIAL:" at 290.74,63.133 h1.52
  text "OF GERBER DATA, WHICHEVER IS SMALLER." at 488.493,61.983 h1.12
  text "FR-4 High Tg" at 315.796,59.568 h1.52
  text "FR-4" at 302.45,59.351 h1.52
  text "X" at 311.898,59.351 h1.52
  text "OTHER" at 339.229,59.351 h1.52
  text "3C. CRITICAL DIMENSIONS FOR THIS DESIGN ARE xxxxxxxxxxxxxxxxxxx" at 480.492,58.197 h1.12
  text "62 MIL (1.6mm) +/-10%" at 309.564,55.218 h1.52
  text "THICKNESS:" at 292.639,55.109 h1.52
  text "X" at 306.309,55.109 h1.52
  text "OTHER" at 342.2,55.109 h1.52
  text "4. DRILL TOLERANCES AND HOLE SIZES ARE FOR FINISHED BOARD:" at 476.682,55.004 h1.12
  text "ALL .004 INCH MICROVIA HOLES ARE +0.001/-0.004 INCH." at 484.429,51.81 h1.12
  text "TOLERANCE:" at 292.639,51.096 h1.52
  text "X" at 313.958,51.096 h1.52
  text "ANSI IPC-6012 TYPE 3 CLASS 2" at 318.706,51.096 h1.52
  text "ALL PLATED THROUGH HOLES TO .080 INCH ARE +/- .003 INCH." at 484.302,48.616 h1.12
  text "OTHER +/-" at 318.705,47.133 h1.52
  text "ALL PLATED THROUGH HOLES OVER .081 INCH ARE +/- .005 INCH." at 484.302,45.423 h1.12
  text "BOW & TWIST:" at 292.639,43.145 h1.52
  text "X" at 313.958,43.145 h1.52
  text "ANSI IPC-6012 TYPE 3 CLASS 2" at 318.706,43.145 h1.52
  text "ALL NON-PLATED THROUGH HOLES ARE +/- .005 INCH." at 484.302,42.229 h1.12
  text "OTHER +/-" at 318.705,39.119 h1.52
  text "5.  ALL HOLES MUST BE REGISTERED WITHIN +/-.003 INCH FROM TRUE POSITION." at 476.682,39.035 h1.12
  text "6.  MINIMUM ANNULAR RING MUST BE .002 INCH." at 476.682,35.842 h1.12
  text "COPPER THICKNESS (FINISHED):" at 290.74,35.678 h1.52
  text "7. PLATING:" at 476.682,32.648 h1.12
  text "1.4MIL (1oz)" at 313.092,31.799 h1.52
  text "2MIL (1.4oz)" at 332.574,31.799 h1.52
  text "2.8MIL (2oz)" at 351.04,31.799 h1.52
  text "OUTER:" at 299.808,31.69 h1.52
  text "X" at 347.98,31.471 h1.52
  text "7A. PER MIL-C-14550, PLATED THROUGH HOLES MUST BE PLATED WITH .0008 MIN. TO" at 480.492,30.047 h1.12
  text "X" at 340.385,27.864 h1.52
  text "1.4MIL (1oz)" at 321.982,27.811 h1.52
  text "2.8MIL (2oz)" at 343.42,27.811 h1.52
  text "INNER SIGNAL:" at 299.808,27.702 h1.52
  text ".0015 INCH MAX. THICK COPPER." at 488.62,26.261 h1.12
  text "DRILLING:" at 290.74,24.172 h1.52
  text "7B. FINISH: IMMERSION GOLD: 2 TO 8 MICROINCHES GOLD OVER 120-240 MICROINCHES" at 480.492,23.067 h1.12
  text "REFERENCE:" at 292.639,21.2 h1.52
  text "X" at 309.104,21.2 h1.52
  text "AS SHOWN" at 313.854,21.2 h1.52
  text "X" at 331.99,21.2 h1.52
  text "NC_DRILL FILES" at 335.469,21.2 h1.52
  text "OF ELECTROLESS NICKEL." at 488.62,19.873 h1.12
  text "PTH MIN COPPER THICKNESS:" at 292.639,17.187 h1.52
  text "X" at 326.935,17.187 h1.52
  text "1MIL" at 330.415,17.187 h1.52
  text "OTHER" at 343.039,17.187 h1.52
  text "8. WARP AND TWIST OF FINISHED BOARDS MUST NOT EXCEED .007 INCH PER INCH." at 476.682,16.68 h1.12
  text "9. SOLDERMASK: PER IPC-SM-840" at 476.682,13.486 h1.12
  text "BOARD FINISH:" at 290.74,13.148 h1.52
  text "9A. SOLDERMASK BOTH TOP AND BOTTOM SIDES." at 480.111,10.292 h1.12
  text "SILKSCREEN:" at 294.683,10.151 h1.52
  text "X" at 318.782,10.151 h1.52
  text "TOP" at 321.982,10.151 h1.52
  text "X" at 331.736,10.151 h1.52
  text "BOTTOM" at 334.961,10.151 h1.52
  text "9B. SOLDERMASK MUST CLEAR ALL LANDS SHOWN ON GERBER SOLDERMASK LAYERS." at 479.984,7.099 h1.12
  text "SILKSCREEN COLOR:" at 294.683,5.909 h1.52
  text "X" at 318.755,5.909 h1.52
  text "WHITE" at 321.982,5.909 h1.52
  text "OTHER" at 334.961,5.909 h1.52
  text "9C. COLOR GREEN AND SOLVENT FREE." at 479.984,3.905 h1.12
  text "SOLDER RESIST COLOR:" at 294.683,1.591 h1.52
  text "9D. LIQUID PHOTO-IMAGEABLE MUST BE .0002 MIN. TO .0008 MAX. INCH THICK MEASURED OVER COPPER PLATING." at 479.984,0.711 h1.12
  text "10. SILKSCREEN TOP AND BOTTOM SIDES USING A GLOSSY WHITE, NONCONDUCTIVE, EPOXY BASED INK." at 476.682,-1.89 h1.12
  text "X" at 309.103,-2.453 h1.52
  text "GREEN" at 312.33,-2.453 h1.52
  text "BLUE" at 327.341,-2.453 h1.52
  text "OTHER" at 341.007,-2.453 h1.52
  text "NO SILKSCREEN ALLOWED ON GOLD AREAS, ON PADS OR IN HOLES." at 484.556,-5.084 h1.12
  text "IMMERSION GOLD (ENIG)" at 317.689,-7.241 h1.52
  text "SURFACE FINISH:" at 290.74,-7.35 h1.52
  text "X" at 312.941,-7.35 h1.52
  text "Pb-FREE HASL" at 348.99,-7.35 h1.52
  text "11. ROUTE BOARD OUTLINE, PER DRAWING DIMENSIONS." at 476.682,-8.277 h1.12
  text "OTHER" at 317.689,-11.338 h1.52
  text "12. VENDOR MUST ENTER VENDOR'S IDENTITY, DATE CODE AND ANY OTHER IDENTIFICATION MARKS ON" at 476.682,-11.471 h1.12
  text "BOTTOM SIDE ETCH (APPROXIMATELY WHERE SHOWN, IF SHOWN)" at 484.429,-14.665 h1.12
  text "ARRAY/PANEL:" at 290.74,-15.884 h1.52
  text "CUT AND TRIM PER MECH LAYER 1" at 317.689,-15.993 h1.52
  text "13. OTHER VENDOR NOMENCLATURE OR MARKINGS SHOULD NOT BE ETCHED OR" at 476.682,-18.451 h1.12
  text "N.C. ROUTE" at 317.689,-19.847 h1.52
  text "X" at 334.936,-19.847 h1.52
  text "V. SCORE" at 339.686,-19.847 h1.52
  text "SILKSCREENED ON BOARD WITHOUT PRIOR PERMISSION." at 484.429,-21.645 h1.12
  text "CERTIFICATION:" at 290.74,-23.326 h1.52
  text "MATERIALS AND WORKMANSHIP FOR ALL PCBS" at 309.155,-23.326 h1.52
  text "14. ALL VENDOR IN-PROCESS MARKINGS, QA STAMPS, ETC. MUST BE PLACED ON THE BOTTOM SIDE OF BOARD." at 476.682,-24.246 h1.12
  text "TO MEET OR EXCEED THE REQUIREMENTS OF:" at 309.155,-25.816 h1.52
  text "15. FINISHED BOARD MUST MEET UL94V-0 RATING AND RoHS COMPLIANCE." at 476.682,-28.032 h1.12
  text "X" at 299.668,-29.283 h1.52
  text "ANSI IPC-A-600F CLASS ->" at 303.199,-29.283 h1.52
  text "X" at 344.831,-29.283 h1.52
  text "2" at 347.852,-29.283 h1.52
  text "1" at 339.851,-29.321 h1.52
  text "3" at 356.844,-29.321 h1.52
  text "16. DOCUMENTATION THAT MUST BE DELIVERED WITH BOARDS:" at 476.682,-31.226 h1.12
  text "X" at 299.72,-33.334 h1.52
  text "UL 94V-0" at 303.199,-33.334 h1.52
  text "X" at 320.345,-33.334 h1.52
  text "RoHS" at 323.824,-33.334 h1.52
  text "OTHER" at 340.191,-33.334 h1.52
  text "PER ORDER" at 350.277,-33.334 h1.52
  text "16A. CROSS SECTION REPORT (SPACING BETWEEN COPPER LAYERS AND COPPER THICKNESS)" at 479.857,-34.419 h1.12
  text "ADDITIONAL REQUIREMENTS:" at 290.74,-36.915 h1.52
  text "16B. ELECTRICAL TEST CERTIFICATION OF COMPLIANCE (ACCORDANCE WITH IPC-ET-652 CLASS II)" at 479.603,-37.613 h1.12
  text "MICROSECTION:" at 292.639,-39.836 h1.52
  text "YES" at 315.645,-39.836 h1.52
  text "16C. RoHS CERTIFICATE OF COMPLIANCE." at 479.476,-40.807 h1.12
  text "REQUIRED" at 337.527,-43.802 h1.52
  text "BARE BOARD ELEC. TEST:" at 292.639,-43.875 h1.52
  text "NONE" at 325.805,-43.875 h1.52
  text "X" at 334.301,-43.875 h1.52
  text "PER ORDER" at 352.564,-43.875 h1.52
  text "16D. MEASUREMENTS OF CRITICAL PAD AND/OR TRACE DIMENSIONS INDICATED ON NOTE 3C" at 479.73,-44 h1.12
  text "16E. IMPEDANCE REPORT (REQUIRED IMPEDANCE TRACES PER NOTE 19)" at 479.73,-47.194 h1.12
  text "MANUFACTURER'S ID/LOGO:" at 292.639,-47.863 h1.52
  text "RAIL" at 329.869,-47.972 h1.52
  text "X" at 339.381,-47.972 h1.52
  text "METAL" at 342.361,-47.972 h1.52
  text "SILK" at 355.358,-47.972 h1.52
  text "17. ALL TOP AND BOTTOM LAYER .0xx TRACES TO BE xx OHM IMPEDANCE." at 476.682,-50.388 h1.12
  text "ALL INTERNAL LAYER .0xx TRACES TO BE xx OHM IMPEDANCE." at 484.937,-53.581 h1.12
  text "TRACE WIDTH AND LAYER SPACING MAY BE CHANGED TO ACCOMMODATE FABRICATION PROCESS BUT" at 484.683,-56.775 h1.12
  text "PRIOR APPROVAL IS REQUIRED BEFORE TRACE WIDTH OR LAYER SPACING CHANGES ARE MADE." at 488.112,-59.969 h1.12
M30 Board Outline:
  the board outline again, w0.1

## Text inside footprints (layer, text, board x,y; h text height)
J1: Top Overlay "+" at 33.376,74.64 h1.78 r270; Top Overlay "+" at 33.371,63.194 h1.78 r270; Top Overlay "-" at 33.627,71.963 h1.78 r270; Top Overlay "-" at 33.626,60.398 h1.78 r270
J2: Top Overlay "+" at 33.376,54.14 h1.78 r270; Top Overlay "+" at 33.371,42.694 h1.78 r270; Top Overlay "-" at 33.627,51.463 h1.78 r270; Top Overlay "-" at 33.626,39.898 h1.78 r270